# Altium PCB FLOM_Converter.PcbDoc
Units mil, origin at the board's own origin, x right, y up, seen from the top; angles counter-clockwise.
Board outline 3791.34 x 1090.76 mil, 4 copper layers (Top Layer, Layer 1, Layer 2, Bottom Layer), stack 59.271 mil thick; 2 components, 47 nets, 198 pads, 16 vias.
Unrouted connection lines stored in the file: 42.
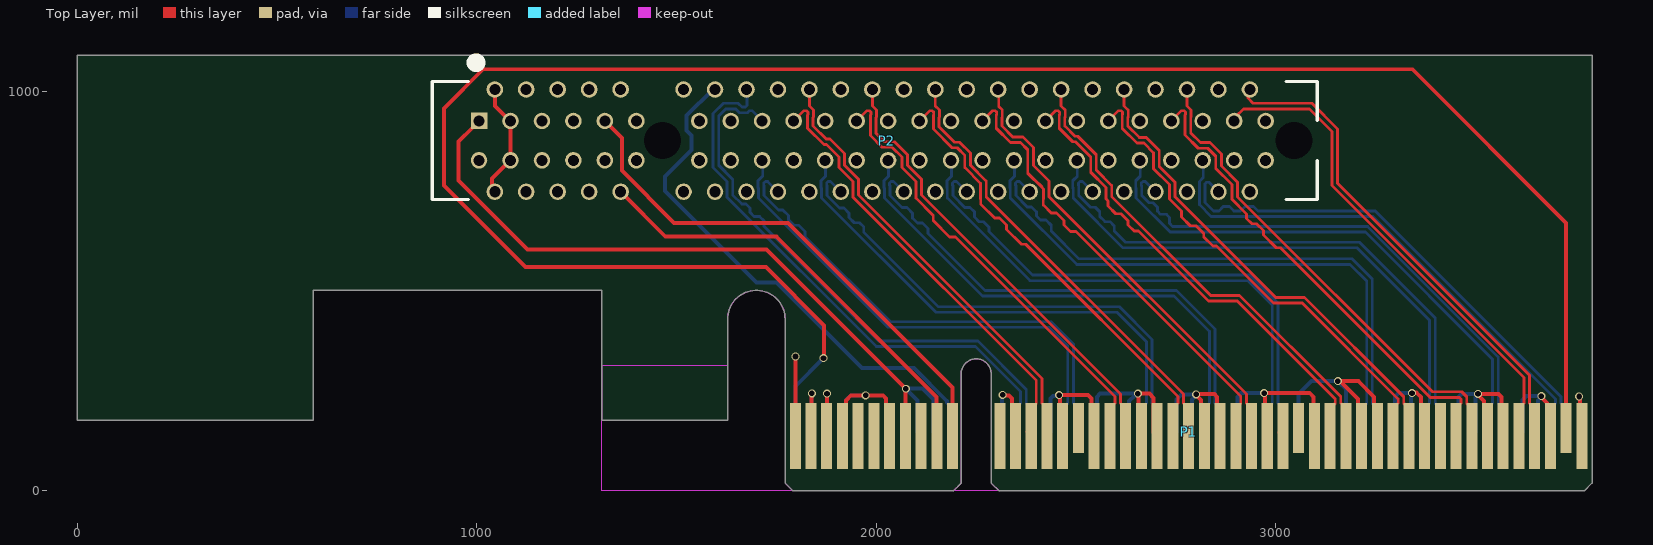
[diagram p0: Top Layer view]
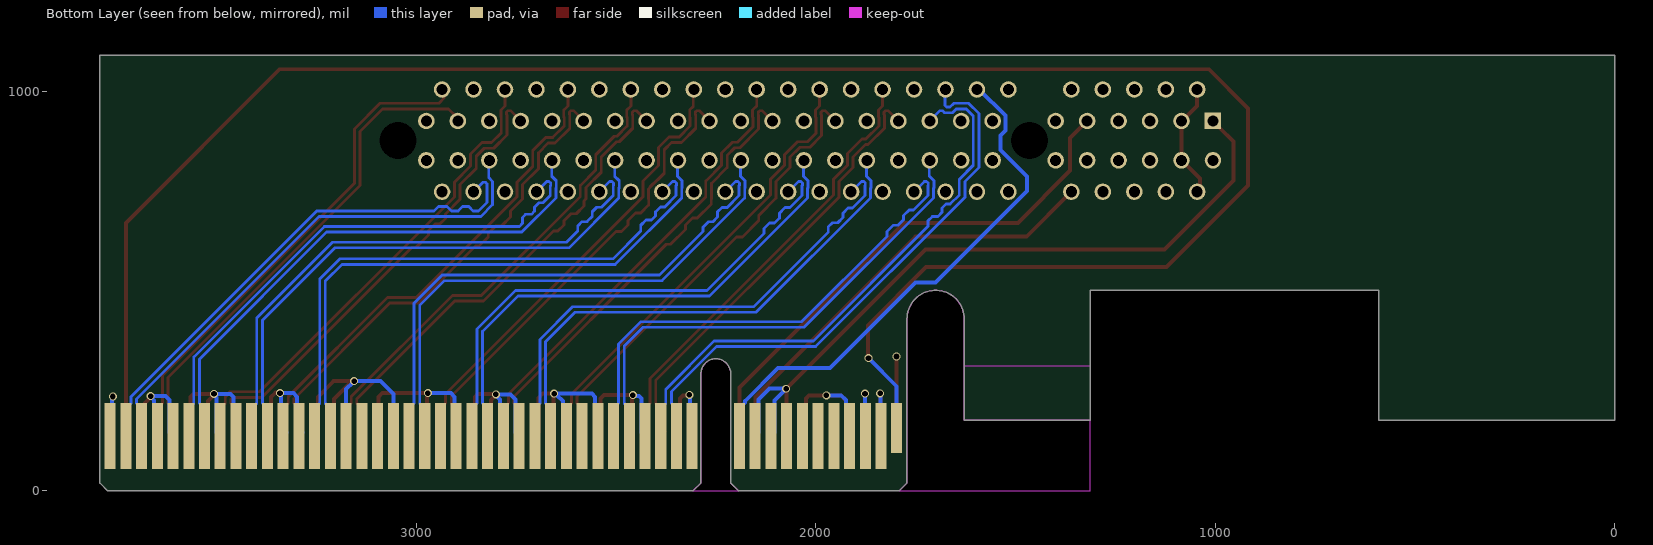
[diagram p1: Bottom Layer view, seen from below]
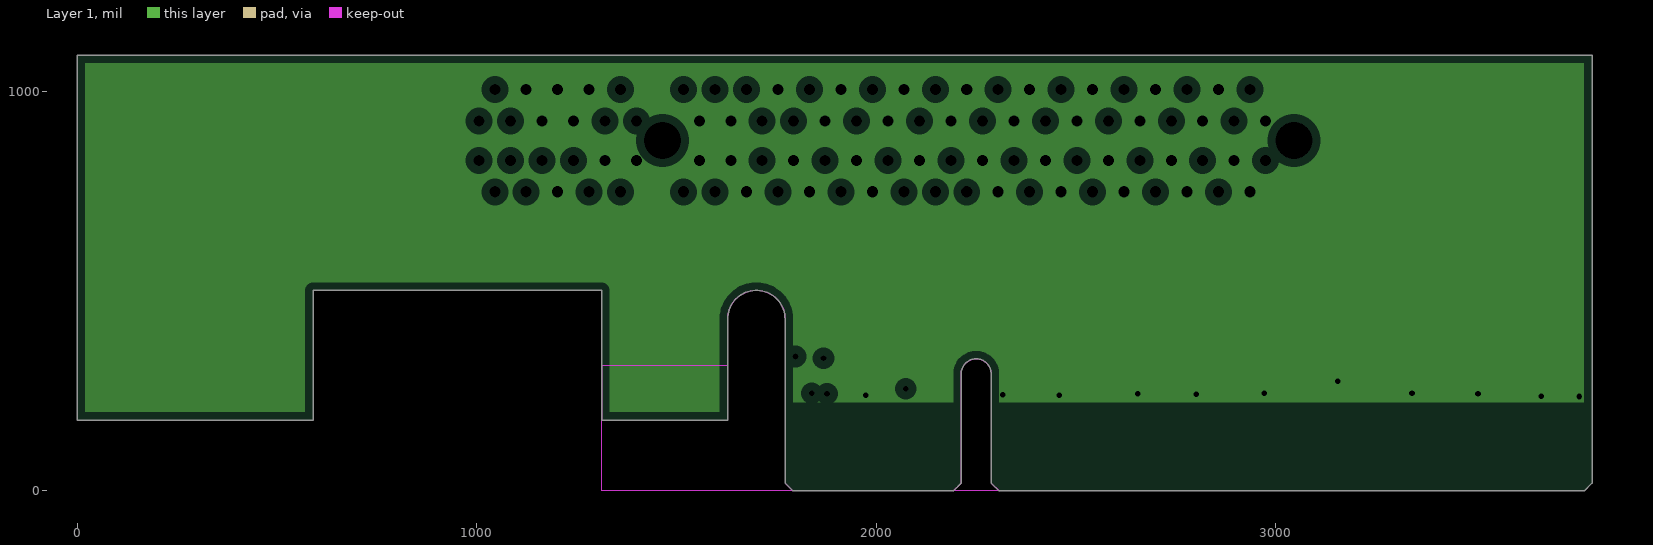
[diagram p2: Layer 1, clearances drawn from the general rule]
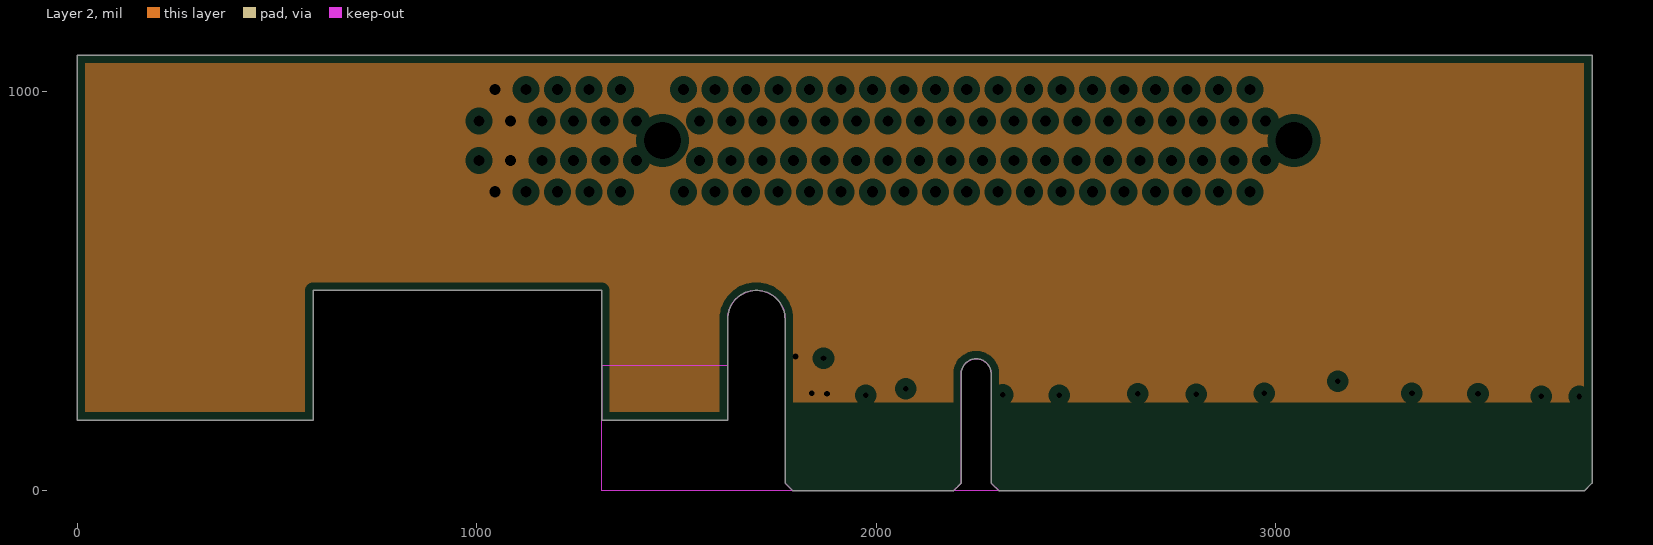
[diagram p3: Layer 2, clearances drawn from the general rule]

## Layer stack, top to bottom
Top Solder: solder mask 0.3937, Solder Resist, Dk 3.5
Top Layer: signal copper 1.4173
Dielectric 2: prepreg 4.6, PP-016, Dk 4.4
Layer 1: plane copper 1.378, net GND
Dielectric 1: dielectric 44.48, FR-4, Dk 4.2
Layer 2: plane copper 1.378, net +12
Dielectric 3: prepreg 4.6, PP-016, Dk 4.4
Bottom Layer: signal copper 1.4173
Bottom Solder: solder mask 0.3937, Solder Resist, Dk 3.5

## Board outline
0,177.17 590.55,177.17 590.55,501.97 1312.99,501.97 1312.99,177.17 1627.95,177.17 1627.95,430.12 cw(c1699.8,430.12) 1771.65,430.12 1771.65,19.69 1791.34,0 2192.91,0 2212.6,19.69 2212.6,293.31 cw(c2250,293.31) 2287.4,293.31 2287.4,19.69 2307.09,0 3771.65,0 3791.34,19.69 3791.34,1090.76 0,1090.76

## Design rules (kind name [scope] priority, off if disabled: settings)
Clearance [All] p1: gap=6 ignorepadtopadclearanceinfootprint=FALSE except(0: Arc-Hole Track-Hole SMDPad-Hole THPad-Hole Via-Hole Fill-Hole Poly-Hole Region-Hole Text-Hole)
ComponentClearance [All] p1: gap=0 collisioncheckmode=3 verticalgap=0 showdistances=FALSE
DiffPairsRouting DiffPairsRouting_1 [All] p1: maxlimit=40 minlimit=7 mostfreqgap=7 toplayer_minwidth=7 toplayer_maxwidth=10 toplayer_prefwidth=7 bottomlayer_minwidth=7 bottomlayer_maxwidth=10 bottomlayer_prefwidth=7 maxuncoupledlength=500
PlaneClearance [All] p1: clearance=20
PlaneConnect [All] p1: planeconnectstyle=Direct reliefexpansion=20 reliefentries=4 reliefconductorwidth=10 reliefairgap=10
PolygonConnect [All] p1: connectstyle=Relief reliefconductorwidth=10 reliefentries=4 polygonreliefangle="90 Angle" airgapwidth=10
RoutingVias [All] p1: holewidth=12 width=20 viastyle="Through Hole" minholewidth=12 minwidth=20 maxholewidth=12 maxwidth=20
SolderMaskExpansion [All] p1: expansion=4
Width [All] p1: maxlimit=393.7 minlimit=7 preferedwidth=10 minimp=50.000000 maximp=50.000000 favimp=50.000000
26 further rules are at their usual default settings.

## Classes and differential pairs
net class PRSNT: PRSNT1
net class 3V3: PWROK
differential pair class 0: Rx0 Tx0
net class GND: GND
net class other: nPERST nWAKE PRSNT1 PRSNT2_x1 PRSNT2_x4 PWROK SDP0_3 SDP1_3
net class CLK: CLK_N CLK_P GF_SMCLK GF_SMDAT
net class 差分: Rx0_N Rx0_P Rx1_N Rx1_P Rx2_N Rx2_P Rx3_N Rx3_P Rx4_N Rx4_P Rx5_N Rx5_P Rx6_N Rx6_P Rx7_N Rx7_P Tx0_N Tx0_P Tx1_N Tx1_P Tx2_N Tx2_P Tx3_N Tx3_P Tx4_N Tx4_P Tx5_N Tx5_P Tx6_N Tx6_P Tx7_N Tx7_P
net class POWER: 3V3AUX +12
differential pair Tx0: +Tx0_P -Tx0_N
differential pair Tx7: +Tx7_P -Tx7_N
differential pair Tx6: +Tx6_P -Tx6_N
differential pair Tx5: +Tx5_P -Tx5_N
differential pair Tx4: +Tx4_P -Tx4_N
differential pair Tx3: +Tx3_P -Tx3_N
differential pair Tx2: +Tx2_P -Tx2_N
differential pair Tx1: +Tx1_P -Tx1_N
differential pair Rx7: +Rx7_P -Rx7_N
differential pair Rx6: +Rx6_P -Rx6_N
differential pair Rx5: +Rx5_P -Rx5_N
differential pair Rx4: +Rx4_P -Rx4_N
differential pair Rx3: +Rx3_P -Rx3_N
differential pair Rx2: +Rx2_P -Rx2_N
differential pair Rx1: +Rx1_P -Rx1_N
differential pair Rx0: +Rx0_P -Rx0_N
differential pair CLK: +CLK_P -CLK_N

## Components (designator, comment, footprint, x,y, rotation, side; value= is the part's Value field where it differs from the comment)
P1 "PCIe_x8_GF_STD" PCIE_X8_GF_STD 0,0 r0 top locked
P2 "87715-9205" BTB1-00-2V98 1005.91,925.86 r0 top locked

## Footprints (in the part's own frame and the unit in brackets; to place one, negate y for a bottom-side part, rotate by r counter-clockwise, add the part's x,y. Pads: shape width x height; smd on the part's side, far side on the other; paste and mask are expansions set on the pad)
BTB1-00-2V98 [mm] "Board-to-Board Connector, PTH, Vertical, Pitch 1.00mm, 98-Position"
  rect 1.05x1.05 hole 0.7: A1(0,0)
  round 1.05 hole 0.7: A2(1,2) A3(2,0) A4(3,2) A5(4,0) A6(5,2) A7(6,0) A8(7,2) A9(8,0) A10(9,2) A11(10,0) A12(13,2) A13(14,0) A14(15,2) A15(16,0) A16(17,2) A17(18,0) A18(19,2) A19(20,0) A20(21,2) A21(22,0) A22(23,2) A23(24,0) A24(25,2) A25(26,0) A26(27,2) A27(28,0) A28(29,2) A29(30,0) A30(31,2) A31(32,0) A32(33,2) A33(34,0) A34(35,2) A35(36,0) A36(37,2) A37(38,0) A38(39,2) A39(40,0) A40(41,2) A41(42,0) A42(43,2) A43(44,0) A44(45,2) A45(46,0) A46(47,2) A47(48,0) A48(49,2) A49(50,0) B1(0,-2.5) B2(1,-4.5) B3(2,-2.5) B4(3,-4.5) B5(4,-2.5) B6(5,-4.5) B7(6,-2.5) B8(7,-4.5) B9(8,-2.5) B10(9,-4.5) B11(10,-2.5) B12(13,-4.5) B13(14,-2.5) B14(15,-4.5) B15(16,-2.5) B16(17,-4.5) B17(18,-2.5) B18(19,-4.5) B19(20,-2.5) B20(21,-4.5) B21(22,-2.5) B22(23,-4.5) B23(24,-2.5) B24(25,-4.5) B25(26,-2.5) B26(27,-4.5) B27(28,-2.5) B28(29,-4.5) B29(30,-2.5) B30(31,-4.5) B31(32,-2.5) B32(33,-4.5) B33(34,-2.5) B34(35,-4.5) B35(36,-2.5) B36(37,-4.5) B37(38,-2.5) B38(39,-4.5) B39(40,-2.5) B40(41,-4.5) B41(42,-2.5) B42(43,-4.5) B43(44,-2.5) B44(45,-4.5) B45(46,-2.5) B46(47,-4.5) B47(48,-2.5) B48(49,-4.5) B49(50,-2.5)
  round 2.05 hole 2.35 unplated: MH1(11.65,-1.25) MH2(51.8,-1.25)
  silkscreen extent -2.98,-5 53.27,4, body extent -2.88,-6.35 53.15,2.5, height 11.25
PCIE_X8_GF_STD [mm] "PCIe x8 Gold Finger Standard Length"
  rect 0.7x3.2 smd far side: A1(45.65,4)
  rect 0.7x4.2 smd far side: A2(46.65,3.5) A3(47.65,3.5) A4(48.65,3.5) A5(49.65,3.5) A6(50.65,3.5) A7(51.65,3.5) A8(52.65,3.5) A9(53.65,3.5) A10(54.65,3.5) A11(55.65,3.5) A12(58.65,3.5) A13(59.65,3.5) A14(60.65,3.5) A15(61.65,3.5) A16(62.65,3.5) A17(63.65,3.5) A18(64.65,3.5) A19(65.65,3.5) A20(66.65,3.5) A21(67.65,3.5) A22(68.65,3.5) A23(69.65,3.5) A24(70.65,3.5) A25(71.65,3.5) A26(72.65,3.5) A27(73.65,3.5) A28(74.65,3.5) A29(75.65,3.5) A30(76.65,3.5) A31(77.65,3.5) A32(78.65,3.5) A33(79.65,3.5) A34(80.65,3.5) A35(81.65,3.5) A36(82.65,3.5) A37(83.65,3.5) A38(84.65,3.5) A39(85.65,3.5) A40(86.65,3.5) A41(87.65,3.5) A42(88.65,3.5) A43(89.65,3.5) A44(90.65,3.5) A45(91.65,3.5) A46(92.65,3.5) A47(93.65,3.5) A48(94.65,3.5) A49(95.65,3.5)
  rect 0.7x4.2 smd: B1(45.65,3.5) B2(46.65,3.5) B3(47.65,3.5) B4(48.65,3.5) B5(49.65,3.5) B6(50.65,3.5) B7(51.65,3.5) B8(52.65,3.5) B9(53.65,3.5) B10(54.65,3.5) B11(55.65,3.5) B12(58.65,3.5) B13(59.65,3.5) B14(60.65,3.5) B15(61.65,3.5) B16(62.65,3.5) B18(64.65,3.5) B19(65.65,3.5) B20(66.65,3.5) B21(67.65,3.5) B22(68.65,3.5) B23(69.65,3.5) B24(70.65,3.5) B25(71.65,3.5) B26(72.65,3.5) B27(73.65,3.5) B28(74.65,3.5) B29(75.65,3.5) B30(76.65,3.5) B32(78.65,3.5) B33(79.65,3.5) B34(80.65,3.5) B35(81.65,3.5) B36(82.65,3.5) B37(83.65,3.5) B38(84.65,3.5) B39(85.65,3.5) B40(86.65,3.5) B41(87.65,3.5) B42(88.65,3.5) B43(89.65,3.5) B44(90.65,3.5) B45(91.65,3.5) B46(92.65,3.5) B47(93.65,3.5) B49(95.65,3.5)
  rect 0.7x3.2 smd: B17(63.65,4) B31(77.65,4) B48(94.65,4)
  Keep-Out Layer board cut-out: 41.35,10.925 41.531,11.717 42.037,12.352 42.769,12.704 43.581,12.704 44.313,12.352 44.819,11.717 45,10.925 45,10.925 45,0.5 45.5,0 33.35,0 33.35,4.5 41.35,4.5
  Keep-Out Layer board cut-out: 56.2,7.45 56.294,7.862 56.558,8.193 56.939,8.376 57.361,8.376 57.742,8.193 58.006,7.862 58.1,7.45 58.1,7.45 58.1,0.5 58.6,0 55.7,0 56.2,0.5
  Keep-Out Layer region: 33.35,4.5 41.35,4.5 41.35,7.95 33.35,7.95

## Part data
P2: library part CMP-0001-00128-1, "Board-to-Board Connector, PTH, Vertical, Pitch 1.00mm, 98-Position", Package Reference=BTB1-00-2V98, ClassName="Board Template Connector", Datasheet Version=Jul-2007, Mating Connector=PCIeX8-GF-2D-1000-1K-O98, Publisher=Altium

## Via types
v1: diameter 20, hole 14, Top Layer to Bottom Layer, tented both sides, 16 vias

## Nets (pads, with @x,y where several pads share a name; then routed paths per layer and width w, separated by ;. In a path a pad name is that pad's centre, name@x,y a point inside that pad or via, vN(x,y) a via of type N, cw(c..) or ccw(c..) an arc to the next point about the centre after c; other vN are vias at no path point)
3V3AUX: P1.B10 P2.B10 | length 1097.7
  Top Layer w10: P2.B10@1361.72,744.26 1364.67,744.26 1472.81,636.12 1749.92,636.12 2150.57,235.47 2150.57,138.8 P1.B10
+12: P1.A2 P1.A3 P1.B1 P1.B2 P1.B3 P2.A2 P2.A3 P2.B2 P2.B3 | length 934.4
  Top Layer w10: P2.B2@1038.35,749.9 1038.35,782.42 1084.19,828.26 1084.19,925.07 1045.78,963.48 P2.A2@1045.78,1004.2 ; v1@1796.8,336.33 1797.58,335.55 1797.58,138.14 P1.B1 ; P1.B2@1834.21,140.19 P1.B2 1837.63,138.82 1837.63,244.37 v1@1838.66,245.39 ; P1.B3@1870.71,143.07 P1.B3 1876.35,138.17 1876.35,240.69 v1@1877.95,242.29
  Bottom Layer w10: P1.A2@1834.21,140.19 P1.A2 1837.63,138.82 1837.63,239.89 v1@1839.69,241.94 ; P1.A3@1870.71,143.07 P1.A3 1876.35,138.17 1876.35,241.82 v1@1875.54,242.63
  other v1: 1838.66,244.01 1876.73,243.54 1797.93,336.34
CLK_N: P1.A14 P2.A17 | length 1417.1
  Bottom Layer w7: P2.A17 1688.86,951.57 1683.06,951.57 1677.99,946.49 1657.86,946.49 1648.32,956.03 1623.33,956.03 1605.66,938.36 1605.66,814.94 1640.63,779.97 1640.63,740.6 1663.53,717.7 1674.13,717.7 1683.71,708.11 1683.71,697.51 1694.39,686.84 1708.15,686.84 1718.94,676.05 1718.94,662.29 2005.94,375.29 2254.15,375.29 2375.11,254.32 2375.11,219.38 2387.8,206.69 P1.A14
CLK_P: P1.A13 P2.A16 | length 1417.2
  Bottom Layer w7: P2.A16 1676.29,1003.51 1676.29,964.6 1672.19,960.49 1663.66,960.49 1654.12,970.03 1617.53,970.03 1591.66,944.16 1591.66,809.14 1626.63,774.17 1626.63,734.8 2000.14,361.29 2248.35,361.29 2361.11,248.53 2361.11,219.38 2348.43,206.69 P1.A13
GF_SMCLK: P1.B5
GF_SMDAT: P1.B6
GND: P1.A4 P1.A12 P1.A15 P1.A18 P1.A20 P1.A23 P1.A24 P1.A27 P1.A31 P1.A34 P1.A37 P1.A38 P1.A41 P1.A42 P1.A45 P1.A46 P1.A49 P1.B4 P1.B7 P1.B13 P1.B16 P1.B18 P1.B21 P1.B22 P1.B25 P1.B26 P1.B29 P1.B32 P1.B35 P1.B36 P1.B39 P1.B40 P1.B43 P1.B44 P1.B47 P1.B49 P2.A4 P2.A5 P2.A6 P2.A7 P2.A8 P2.A13 P2.A15 P2.A18 P2.A21 P2.A22 P2.A25 P2.A26 P2.A29 P2.A30 P2.A33 P2.A34 P2.A37 P2.A38 P2.A41 P2.A42 P2.A45 P2.A46 P2.A49 P2.B6 P2.B9 P2.B11 P2.B13 P2.B15 P2.B16 P2.B19 P2.B20 P2.B23 P2.B24 P2.B27 P2.B31 P2.B32 P2.B35 P2.B36 P2.B39 P2.B40 P2.B43 P2.B44 P2.B47 P2.B48 | length 4893.2
  Top Layer w10: P1.B4 1924.13,146.57 1924.13,226.42 1937.16,239.45 1972.67,239.45 v1@1972.75,239.53 ; v1@1974.13,239.19 1974.39,239.45 2016.27,239.45 2024.69,231.03 2024.69,146.57 P1.B7 ; v1@2315.58,240.91 2317.98,238.51 2332.14,238.51 2339.65,231.01 2339.65,146.57 P1.B13 ; v1@2458.17,237.49 2460.56,239.88 2530.08,239.88 2538.33,231.64 2538.33,144.74 P1.B18 ; v1@2459.72,237.49 2459.72,144.61 P1.B16 ; v1@2654.97,242.87 2656.4,241.44 2656.4,144.78 P1.B21 ; v1@2655.95,243.84 2656.44,243.36 2683.78,243.36 2693.98,233.16 2693.98,146.57 P1.B22 ; v1@2801.47,242.38 2845.91,242.38 2852.82,235.47 2852.82,145.21 P1.B26 ; v1@2802.44,241.39 2802.44,237.11 2812.09,227.46 2812.09,146.57 P1.B25 ; v1@2971.9,243.36 2972.35,242.91 2972.35,143.79 P1.B29 ; v1@2971.9,244.33 2972.39,244.82 3084.71,244.82 3094.05,235.47 3094.05,140.2 P1.B32 ; v1@3158.45,273.14 3158.45,273.54 3159.73,274.83 3206.09,274.83 3245.44,235.47 3245.44,146.29 P1.B36 ; v1@3161.86,273.63 3205.79,229.71 3205.79,146.57 P1.B35 ; v1@3347.26,245.72 3352.29,245.72 3363.27,234.74 3363.27,146.57 P1.B39 ; v1@3505.17,240.65 3520.75,225.07 3520.75,146.57 P1.B43 ; v1@3506.14,242.87 3557.42,242.87 3564.81,235.47 3564.81,141.88 P1.B44 ; v1@3663.64,235.16 3678.23,220.57 3678.23,146.57 P1.B47 ; v1@3759.72,234.86 3760.63,233.95 3760.63,142.91 P1.B49
  Bottom Layer w10: P1.A4 1924.13,146.57 1924.13,227.44 1936.14,239.45 1972.76,239.45 v1@1973.74,240.42 ; P1.A12 2314.15,142.89 2314.15,241.85 v1@2313.62,242.38 ; P1.A15 2435.94,146.57 2435.94,231.38 2442.53,237.97 2453.76,237.97 v1@2455.73,239.94 ; P1.A18 2551.86,144.38 2551.86,235.47 2559.75,243.36 v1@2651.55,243.36 ; P1.A20 2632.8,146.57 2632.8,224.6 v1@2647.16,238.96 ; P1.A23 2750.9,146.57 2750.9,228.44 2764.2,241.73 v1(2800.52,241.73) 2801.63,241.73 v1@2801.96,241.4 ; P1.A24 2790.27,146.57 2790.27,228.78 2798.61,237.11 2798.61,239.87 v1@2797.08,241.4 ; P1.A27 2903.46,141.65 2903.46,235.47 2912.81,244.82 v1@2969.95,244.82 ; P1.A31 3057.09,242.6 3089.32,274.83 3154.81,274.83 v1@3155.52,274.12 ; v1@3158.36,273.76 3158.36,271.57 3175.2,254.74 P1.A34 ; P1.A37@3284.53,146.57 P1.A37 3297.69,142.18 3297.69,235.47 3306.96,244.74 3336.94,244.74 v1@3337.72,243.95 ; P1.A38@3324.55,145.92 P1.A38 3338.57,143.68 3338.57,243.41 v1@3340.15,244.99 ; P1.A41 3457.24,144.25 3457.24,235.47 3464.63,242.87 v1@3505.17,242.87 ; P1.A42 3498.94,146.57 3498.94,233.44 3503.74,238.25 3503.74,241.85 v1@3503.7,241.89 ; P1.A45 3617.05,146.57 3617.05,227.86 3626.56,237.37 v1(3664.14,237.37) 3664.57,237.37 v1@3664.87,237.67 ; P1.A46 3656.42,146.57 3656.42,226.93 3662.23,232.75 3662.23,236.13 v1@3662.08,236.27 ; v1@3759.72,237.37 3760.63,236.45 3760.63,142.91 P1.A49
  other v1: 3758.72,236.36 1973.25,239.45 2457.81,239.88 2316.07,240.43 3505.65,242.87 2654.48,243.36 2970.44,244.82 3340.48,244.74 3155.11,274.83
nPERST: P1.A11 P2.A14 | length 1335.5
  Bottom Layer w10: P2.A14@1596.37,1005.02 1591.46,1005.02 1525.42,938.98 1525.42,902.06 1537.46,890.02 1537.46,853.11 1471.07,786.72 1471.07,750.55 1700.11,521.52 1750.47,521.52 1964.53,307.46 2093.93,307.46 2176.36,225.03 2176.36,221.28 2190.95,206.69 P1.A11
nWAKE: P1.B11 P2.A9 | length 1317.7
  Top Layer w10: P2.A9@1318.95,927.49 1319.24,927.49 P2.A9 1363.39,883.34 1363.39,801.79 1494.16,671.01 1778.57,671.01 2190.95,258.64 P1.B11
PRSNT1: P1.A1 P1.B48 | length 5095.3
  Top Layer w10: v1@1870,332.95 1869.52,333.43 1869.52,414.57 1723.85,560.24 1121.85,560.24 917.85,764.24 917.85,956.82 1016.28,1055.25 3341.55,1055.25 3726.38,670.42 P1.B48
  Bottom Layer w10: P1.A1 1797.24,261.81 v1@1866.8,331.36
  other v1: 1867.86,332.42
PRSNT2_x1: P1.B17
PRSNT2_x4: P1.B31
PWROK: P1.A9 P1.A10 P1.B8 P2.A1 | length 1928.1
  Top Layer w10: P2.A1@1001.76,928.25 P2.A1@1006.75,923.26 ; P2.A1@1004.72,924.62 1004.67,924.62 990.24,910.19 990.24,910.13 954.28,874.18 954.28,776.74 1127.08,603.94 1725.59,603.94 v1@2072.84,256.7 ; P1.B8 2073.47,138.43 2073.47,253.61 v1@2073.41,253.66
  Bottom Layer w10: v1@2077.89,256.08 2115.81,256.08 2142.8,229.09 2142.8,146.57 P1.A10 ; v1@2078.58,254.01 2077.37,252.79 2077.37,252.47 2103.43,226.41 2103.43,146.57 P1.A9
  other v1: 2074.1,255.73
Rx0_N: P1.A17 P2.B18 | length 1256.2
  Bottom Layer w7: P2.B18@1754.45,749.2 1753.43,749.2 1728.23,774.4 1722.43,774.4 1718.33,770.3 1718.33,764.5 1719.37,763.47 1719.37,739.19 1755.3,703.25 1765.86,703.25 1779.97,689.14 1779.97,678.58 1793.47,665.08 1805.69,665.08 1821.46,649.31 1821.46,637.09 2034.94,423.61 2437.66,423.61 2493.22,368.05 2493.22,219.38 2505.91,206.69 P1.A17
Rx0_P: P1.A16 P2.B17 | length 1256.9
  Bottom Layer w7: P2.B17 1715.66,826.34 1715.66,787.43 1704.33,776.1 1704.33,758.7 1705.37,757.67 1705.37,733.39 2029.14,409.61 2431.86,409.61 2479.22,362.25 2479.22,219.38 2466.54,206.69 P1.A16
Rx1_N: P1.A22 P2.B22 | length 1302.3
  Bottom Layer w7: P2.B22 1885.71,774.4 1879.91,774.4 1875.81,770.3 1875.81,764.5 1876.85,763.47 1876.85,739.19 1908.34,707.69 1919.09,707.69 1931.97,694.81 1931.97,684.06 1944.85,671.18 1957.75,671.18 1968.84,660.09 1968.84,647.19 2154.9,461.13 2608.04,461.13 2690.07,379.1 2690.07,219.38 2702.76,206.69 P1.A22
Rx1_P: P1.A21 P2.B21 | length 1302.8
  Bottom Layer w7: P2.B21 1873.14,826.34 1873.14,787.43 1861.81,776.1 1861.81,758.7 1862.85,757.67 1862.85,733.39 2149.1,447.13 2602.24,447.13 2676.07,373.3 2676.07,219.38 2663.39,206.69 P1.A21
Rx2_N: P1.A26 P2.B26 | length 1318.4
  Bottom Layer w7: P2.B26 2043.19,774.4 2037.39,774.4 2033.29,770.3 2033.29,764.5 2034.33,763.47 2034.33,739.19 2064.39,709.12 2076.58,709.12 2090.9,694.81 2090.9,682.61 2103.05,670.47 2115.95,670.47 2129.56,656.86 2129.56,643.96 2271.82,501.69 2751.03,501.69 2847.55,405.17 2847.55,219.38 2860.24,206.69 P1.A26
Rx2_P: P1.A25 P2.B25 | length 1318
  Bottom Layer w7: P2.B25 2030.62,826.34 2030.62,787.43 2019.29,776.1 2019.29,758.7 2020.33,757.67 2020.33,733.39 2266.02,487.69 2745.23,487.69 2833.55,399.37 2833.55,219.38 2820.87,206.69 P1.A25
Rx3_N: P1.A30 P2.B30 | length 1355.8
  Bottom Layer w7: P2.B30 2200.67,774.4 2194.87,774.4 2190.77,770.3 2190.77,764.5 2191.81,763.47 2191.81,739.19 2221.35,709.64 2234.79,709.64 2245.63,698.81 2245.63,685.36 2257.47,673.52 2268.28,673.52 2282.07,659.73 2282.07,648.92 2390.76,540.23 2934.58,540.23 3005.03,469.78 3005.03,219.38 3017.72,206.69 P1.A30
Rx3_P: P1.A29 P2.B29 | length 1355.9
  Bottom Layer w7: P2.B29 2188.1,826.34 2188.1,787.43 2176.77,776.1 2176.77,758.7 2177.81,757.67 2177.81,733.39 2384.96,526.23 2928.78,526.23 2991.03,463.98 2991.03,219.38 2978.35,206.69 P1.A29
Rx4_N: P1.A36 P2.B34 | length 1470.5
  Bottom Layer w7: P2.B34 2358.15,774.4 2352.35,774.4 2348.25,770.3 2348.25,764.5 2349.29,763.47 2349.29,739.19 2377.85,710.63 2388.46,710.63 2400.61,698.48 2400.61,687.87 2410.68,677.79 2424.9,677.79 2437.71,664.99 2437.71,650.77 2507.68,580.8 3191.15,580.8 3241.25,530.7 3241.25,219.38 3253.94,206.69 P1.A36
Rx4_P: P1.A35 P2.B33 | length 1470.3
  Bottom Layer w7: P2.B33 2345.58,826.34 2345.58,787.43 2334.25,776.1 2334.25,758.7 2335.29,757.67 2335.29,733.39 2501.88,566.8 3185.35,566.8 3227.25,524.9 3227.25,219.38 3214.57,206.69 P1.A35
Rx5_N: P1.A40 P2.B38 | length 1413.1
  Bottom Layer w7: P2.B38 2515.63,774.4 2509.83,774.4 2505.73,770.3 2505.73,764.5 2506.77,763.47 2506.77,739.19 2535.97,709.98 2548.02,709.98 2559.19,698.81 2559.19,686.76 2572.1,673.85 2584.48,673.85 2595.64,662.69 2595.64,650.31 2623.58,622.38 3209.41,622.38 3398.73,433.05 3398.73,219.38 3411.42,206.69 P1.A40
Rx5_P: P1.A39 P2.B37 | length 1413.1
  Bottom Layer w7: P2.B37 2503.06,826.34 2503.06,787.43 2491.73,776.1 2491.73,758.7 2492.77,757.67 2492.77,733.39 2617.78,608.38 3203.61,608.38 3384.73,427.25 3384.73,219.38 3372.05,206.69 P1.A39
Rx6_N: P1.A44 P2.B42 | length 1356
  Bottom Layer w7: P2.B42 2673.11,774.4 2667.31,774.4 2663.21,770.3 2663.21,764.5 2664.25,763.47 2664.25,739.19 2682.29,721.14 2692.16,721.14 2703.35,709.95 2703.35,700.09 2711.24,692.19 2726.05,692.19 2733.61,684.62 2733.61,669.82 2741.51,661.93 3229.69,661.93 3556.21,335.4 3556.21,219.38 3568.9,206.69 P1.A44
Rx6_P: P1.A43 P2.B41 | length 1355.9
  Bottom Layer w7: P2.B41 2660.54,826.34 2660.54,787.43 2649.21,776.1 2649.21,758.7 2650.25,757.67 2650.25,733.39 2735.71,647.93 3223.89,647.93 3542.21,329.6 3542.21,219.38 3529.53,206.69 P1.A43
Rx7_N: P1.A48 P2.B46 | length 1305.6
  Bottom Layer w7: P2.B46 2832.36,772.63 2826.57,772.63 2822.46,768.53 2822.46,722.18 2843.79,700.86 2857.81,700.86 2868.41,711.45 2884.18,711.45 2894.78,700.86 2911.61,700.86 2922.61,711.86 2944.05,711.86 2955.05,700.86 3248.61,700.86 3713.69,235.77 3713.69,219.38 3726.38,206.69 P1.A48
Rx7_P: P1.A47 P2.B45 | length 1305.6
  Bottom Layer w7: P2.B45 2818.02,826.34 2818.02,783.88 2808.46,774.33 2808.46,716.38 2837.99,686.86 3242.81,686.86 3699.69,229.97 3699.69,219.38 3687.01,206.69 P1.A47
SDP0_3: P2.A11
SDP1_3: P2.A10
Tx0_N: P1.B15 P2.A20 | length 1119.4
  Top Layer w7: P2.A20 1832.68,963.6 1842.96,953.31 1842.96,935.92 1841.88,934.83 1841.88,913.36 1874.64,880.6 1883.99,880.6 1920.62,843.97 1920.62,814.94 1955.59,779.97 1955.59,740.6 2414.48,281.71 2414.48,219.38 2427.17,206.69 P1.B15
Tx0_P: P1.B14 P2.A19 | length 1119.1
  Top Layer w7: P2.A19 1819.06,951.62 1824.86,951.62 1828.96,947.51 1828.96,941.72 1827.88,940.63 1827.88,907.56 1868.85,866.6 1875.55,866.6 1906.62,835.53 1906.62,809.14 1941.59,774.17 1941.59,734.8 2400.48,275.91 2400.48,219.38 2387.8,206.69 P1.B14 P1.B14@2377.52,148.07
Tx1_N: P1.B20 P2.A24 | length 1144.9
  Top Layer w7: P2.A24 1990.16,963.6 2000.44,953.31 2000.44,935.92 1999.36,934.83 1999.36,895.1 2020.64,873.82 2045.61,873.82 2078.1,841.33 2078.1,814.94 2113.07,779.97 2113.07,740.6 2611.33,242.34 2611.33,219.38 2624.02,206.69 P1.B20
Tx1_P: P1.B19 P2.A23 | length 1144
  Top Layer w6: P1.B19@2582.43,140.02 P1.B19
  Top Layer w7: P2.A23 1976.54,951.62 1982.34,951.62 1986.44,947.51 1986.44,941.72 1985.36,940.63 1985.36,889.3 2014.84,859.82 2039.81,859.82 2064.1,835.53 2064.1,809.14 2099.07,774.17 2099.07,734.8 ; 2099.02,735.33 2099.02,732.61 2142.52,689.12 2142.52,676.43 2183.3,635.65 2198.22,635.65 2597.33,236.54 2597.33,219.38 2584.65,206.69 P1.B19
Tx2_N: P1.B24 P2.A28 | length 1137.8
  Top Layer w7: P2.A28 2147.64,963.6 2157.92,953.31 2157.92,935.92 2156.84,934.83 2156.84,911.31 2195.47,872.68 2208.41,872.68 2235.58,845.51 2235.58,814.94 2274.95,775.57 2274.95,736.2 2768.81,242.34 2768.81,219.38 2781.5,206.69 P1.B24
Tx2_P: P1.B23 P2.A27 | length 1137.4
  Top Layer w7: P2.A27 2134.02,951.62 2139.82,951.62 2143.92,947.51 2143.92,941.72 2142.84,940.63 2142.84,905.51 2189.67,858.68 2202.61,858.68 2221.58,839.72 2221.58,809.14 2260.95,769.77 2260.95,730.4 ; 2261.23,729.89 2261.23,718.11 2296.57,682.77 2308.58,682.77 2325.68,665.67 2325.68,654.57 2363.06,617.19 2374.16,617.19 2754.81,236.54 2754.81,219.38 2742.13,206.69 P1.B23
Tx3_N: P1.B28 P2.A32 | length 1145
  Top Layer w7: P2.A32 2306.54,1003.18 2306.54,962.18 2315.4,953.31 2315.4,935.92 2314.32,934.83 2314.32,913.36 2341.63,886.05 2366.74,886.05 2393.06,859.73 2393.06,814.64 2432.43,775.27 2432.43,736.2 2926.29,242.34 2926.29,219.38 2938.98,206.69 P1.B28
Tx3_P: P1.B27 P2.A31 | length 1144.6
  Top Layer w7: P2.A31 2291.5,951.62 2297.3,951.62 2301.4,947.51 2301.4,941.72 2300.32,940.63 2300.32,907.56 2335.84,872.05 2360.95,872.05 2379.06,853.93 2379.06,795.11 2395.31,778.86 2396.35,778.86 2414.03,761.19 2414.03,760.14 2418.43,755.74 2418.43,730.4 ; 2418,727.17 2418,715.4 2437.93,695.46 2450.62,695.46 2469.65,676.43 2469.65,665.56 2485.96,649.24 2499.58,649.24 2912.29,236.54 2912.29,219.38 2899.61,206.69 P1.B27
Tx4_N: P1.B34 P2.A36 | length 1209.1
  Top Layer w7: P2.A36 2462.6,963.6 2472.88,953.31 2472.88,935.92 2471.8,934.83 2471.8,913.36 2497.44,887.72 2504.14,887.72 2550.54,841.33 2550.54,803.31 2589.07,764.78 2589.07,737.04 2836.87,489.24 2909.05,489.24 3162.51,235.77 3162.51,219.38 3175.2,206.69 P1.B34
Tx4_P: P1.B33 P2.A35 | length 1209.5
  Top Layer w7: P2.A35 2448.98,951.62 2454.78,951.62 2458.88,947.51 2458.88,941.72 2457.8,940.63 2457.8,907.56 2491.64,873.72 2498.34,873.72 2536.54,835.53 2536.54,797.51 2575.07,758.98 2575.07,731.24 2580.2,724.46 2580.2,712.68 2599.23,693.65 2612.66,693.65 2630.04,676.27 2630.04,665.56 2645.44,650.15 2656.16,650.15 2831.07,475.24 2903.25,475.24 3148.51,229.97 3148.51,219.38 3135.83,206.69 P1.B33
Tx5_N: P1.B38 P2.A40 | length 1215.3
  Top Layer w7: P2.A40 2620.08,963.6 2630.36,953.31 2630.36,935.92 2629.28,934.83 2629.28,913.36 2658.21,884.43 2675.48,884.43 2708.02,851.89 2708.02,811.94 2747.39,772.57 2747.39,736.2 2999.48,484.11 3071.66,484.11 3319.99,235.77 3319.99,219.38 3332.68,206.69 P1.B38
Tx5_P: P1.B37 P2.A39 | length 1215.4
  Top Layer w7: P2.A39 2606.46,951.62 2612.26,951.62 2616.36,947.51 2616.36,941.72 2615.28,940.63 2615.28,907.56 2652.42,870.43 2669.68,870.43 2694.02,846.09 2694.02,806.14 2733.39,766.77 2733.39,730.4 2763.49,700.3 2763.49,685.79 2785.53,663.75 2800.04,663.75 2819.38,644.41 2819.38,635.91 2842.63,612.66 2851.13,612.66 2993.68,470.11 3065.86,470.11 3305.99,229.97 3305.99,219.38 3293.31,206.69 P1.B37
Tx6_N: P1.B42 P2.A44 | length 1219.6
  Top Layer w7: P2.A44 2777.56,963.6 2787.84,953.31 2787.84,935.92 2786.76,934.83 2786.76,896.41 2811.57,871.6 2835.22,871.6 2863.57,843.26 2863.57,813.11 2904.12,772.56 2904.12,735.86 3391.9,248.07 3465.17,248.07 3477.47,235.77 3477.47,219.38 3490.16,206.69 P1.B42
Tx6_P: P1.B41 P2.A43 | length 1219.3
  Top Layer w7: P2.A43 2763.94,951.62 2769.74,951.62 2773.84,947.51 2773.84,941.72 2772.76,940.63 2772.76,890.61 2805.77,857.6 2829.43,857.6 2849.57,837.46 2849.57,807.31 2890.12,766.76 2890.12,730.06 2926.78,693.39 2926.78,681.78 2939.81,668.76 2951.42,668.76 2968.86,651.32 2968.86,640.71 3000.92,608.65 3011.53,608.65 3386.1,234.07 3459.37,234.07 3463.47,229.97 3463.47,219.38 3450.79,206.69 P1.B41
Tx7_N: P1.B46 P2.A48 | length 1250.2
  Top Layer w7: P2.A48@2938.13,1000.92 2929.85,992.64 2929.85,982.94 2942.76,970.03 3090.07,970.03 3154.48,905.62 3154.48,769.99 3634.95,289.51 3634.95,219.38 3647.64,206.69 P1.B46
Tx7_P: P1.B45 P2.A47 | length 1250.5
  Top Layer w7: P2.A47@2899.43,924.9 2900.39,925.86 2900.39,937.77 2918.65,956.03 3084.27,956.03 3140.48,899.82 3140.48,764.19 3620.95,283.72 3620.95,219.38 3608.27,206.69 P1.B45
pads on no net: P1.A5 P1.A6 P1.A7 P1.A8 P1.A19 P1.A28 P1.A32 P1.A33 P1.B9 P1.B12 P1.B30 P2.A12 P2.B1 P2.B4 P2.B5 P2.B7 P2.B8 P2.B12 P2.B14 P2.B28 P2.B49 P2.MH1 P2.MH2
copper on no net: | length 12.4
  Top Layer w10: 3008.94,146.57 3017.72,137.8

## Polygon pours and split planes (outlines as drawn)
GND on Layer 1 (split plane): 160 vertices, not listed, extent 20.1,197.26 3771.24,1070.66
+12 on Layer 2 (split plane): 160 vertices, not listed, extent 20.1,197.26 3771.24,1070.66

## Other copper
Top Layer:
  region: 1112.2,864.84
Layer 1 (plane layer: these items are gaps in the copper):
  region: 3169.29,511.81
  pour cut-out: 1771.65,19.68 1791.34,-0.14 2192.91,0 2212.6,19.69 2212.6,220.47 1771.65,220.47
  pour cut-out: 2307.09,-0.53 2287.4,19.16 2287.4,220.47 3791.34,220.47 3791.34,19.69 3771.65,0
Layer 2 (plane layer: these items are gaps in the copper):
  pour cut-out: 2307.09,-0.53 2287.4,19.16 2287.4,220.47 3791.34,220.47 3791.34,19.69 3771.65,0
  pour cut-out: 1771.65,19.68 1791.34,-0.14 2192.91,0 2212.6,19.69 2212.6,220.47 1771.65,220.47

## Silkscreen, mask and mechanical layers (free items; w line width, h text height)
Top Solder:
  text "FLOM2PCIe" at 153.92,950.62 h47.24
  text "Designed by" at 120.88,891.35 h47.24
  text "Wangrb" at 211.65,825.55 h47.24
  text "Modified by" at 137.43,758.2 h47.24
  text "KCORE@Hobby" at 114.07,688.11 h47.24
Mechanical 1:
  lines w3.94: 0,177.17 0,1090.76 3791.34,1090.76 3791.34,501.97

## Dimensions
0,1090.76 to 1791.34,0 on Mechanical 15